# EAGLE board PCB (EAGLE 9.7.0)
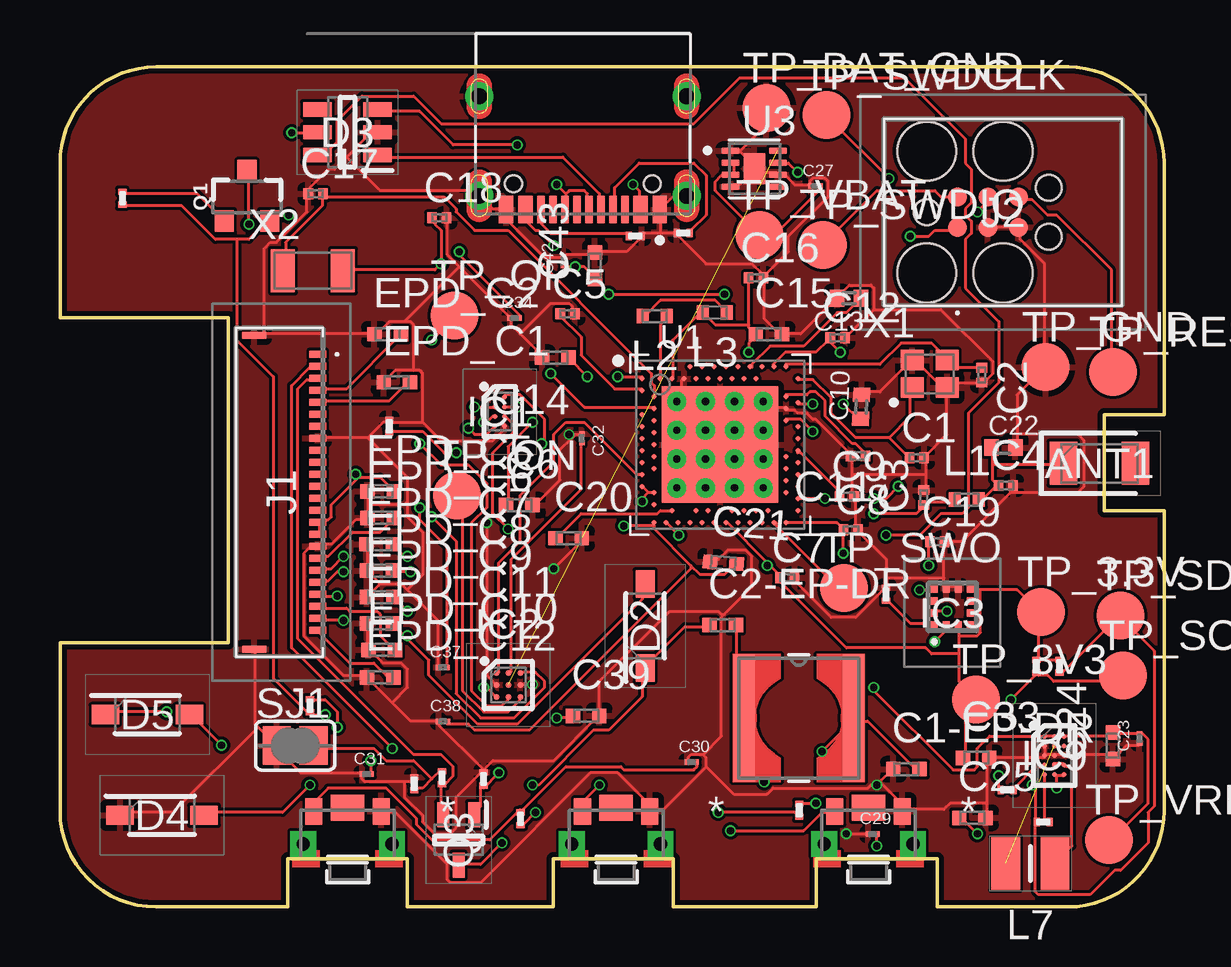
[diagram p0: board, top side]
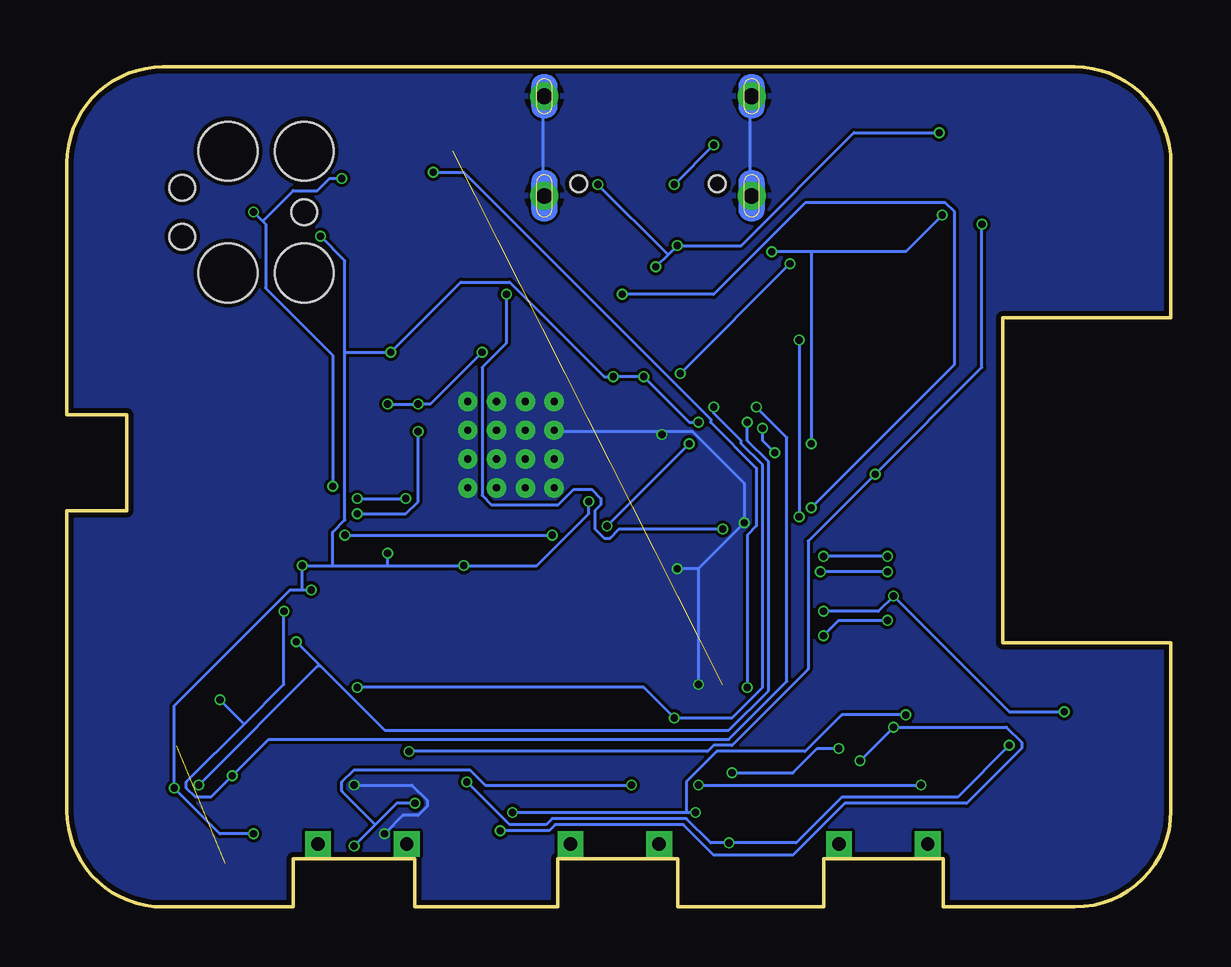
[diagram p1: board, bottom side, seen from below]

Size 46 x 35 mm. Coordinates in mm from the lower left corner, seen from the top.
Outline: 0.01,4 0,4.01 0,11 7,11 7,24.55 0,24.55 0,31 arc-90 4,35 42,35 arc-90 46,31 46,20.5 43.5,20.5 43.5,16.5 46,16.5 46,4 arc-90 42,0 36.56,0 36.56,2 31.5,2 31.5,0 25.56,0 25.56,2 20.54,2 20.54,0 14.47,0 14.47,2 9.5,2 9.5,0 4,0 arc-90 0,4
Copper layers (1*16): Top 0.035mm / dielectric 1.6mm / Bottom 0.035mm
Design rules "jlcpcb-2layers": minimum track width 5mil, minimum drill 0.3mm, track to track 5mil, track to pad 5mil, pad to pad 5mil, via to via 5mil, smd to smd 5mil, copper to edge 0.2mm, drill to drill 6mil, minimum pad ring 10mil, minimum via ring 3mil, stop-mask expansion 4mil, vias tented up to drill 0mil, thermal gap 10mil

## Footprints (pad centres in the part's own frame; a part is rotated, then mirrored left to right if it is on the bottom)
2450AT18B100E_ANTC3216X140N = smd 1.15 x 1.8: 1 -1.5,0; 2 1.5,0
NORDIC_NRF_3_RESC0201_N = smd 0.4 x 0.45: 1 -0.305,0; 2 0.305,0
NORDIC_NRF_3_RESC0402_N = smd 0.6 x 0.6: 1 -0.55,0; 2 0.55,0
PERFECT_0402_0402 = smd 0.6 x 0.7: 1 -0.5,0; 2 0.5,0
GRM011R60J152KE01L_2_CAPC0201X13N = smd 0.22 x 0.23: 1 -0.185,0; 2 0.185,0
ESP32_C6_LIBRARY_5_SOD3716X135N = smd 1.15 x 0.8: 1 -1.75,0; 2 1.75,0
ESP32_C6_LIBRARY_3_SOT95P280X145-6N = smd 1.2 x 0.6: 1 -1.25,0.95; 2 -1.25,0; 3 -1.25,-0.95; 4 1.25,-0.95; 5 1.25,0; 6 1.25,0.95
BQ25180YBGR_BGA8C40P2X4_100X155X50 = smd 0.2 x 0.2: A1 -0.2,0.6; A2 0.2,0.6; B1 -0.2,0.2; B2 0.2,0.2; C1 -0.2,-0.2; C2 0.2,-0.2; D1 -0.2,-0.6; D2 0.2,-0.6
DRV2605YZFR_BGA9C50P3X3_144X144X62 = smd 0.25 x 0.25: A1 -0.5,0.5; A2 0,0.5; A3 0.5,0.5; B1 -0.5,0; B2 0,0; B3 0.5,0; C1 -0.5,-0.5; C2 0,-0.5; C3 0.5,-0.5
BMA423_BMA423 = smd 0.3 x 0.35: 1 -0.75,-0.775; 2 -0.25,-0.775; 3 0.25,-0.775; 4 0.75,-0.775; 7 0.75,0.775; 8 0.25,0.775; 9 -0.25,0.775; 10 -0.75,0.775 | smd 0.35 x 0.3: 5 0.775,-0.25; 6 0.775,0.25; 11 -0.775,0.25; 12 -0.775,-0.25
RT6160AWSC_BGA15C40P3X5_140X230X60 = smd 0.216 x 0.216: A1 -0.4,0.8; A2 0,0.8; A3 0.4,0.8; B1 -0.4,0.4; B2 0,0.4; B3 0.4,0.4; C1 -0.4,0; C2 0,0; C3 0.4,0; D1 -0.4,-0.4; D2 0,-0.4; D3 0.4,-0.4; E1 -0.4,-0.8; E2 0,-0.8; E3 0.4,-0.8
503480-2400_5034802400 = smd 0.3 x 0.7: 1 -5.75,1.525; 2 -5.25,1.525; 3 -4.75,1.525; 4 -4.25,1.525; 5 -3.75,1.525; 6 -3.25,1.525; 7 -2.75,1.525; 8 -2.25,1.525; 9 -1.75,1.525; 10 -1.25,1.525; 11 -0.75,1.525; 12 -0.25,1.525; 13 0.25,1.525; 14 0.75,1.525; 15 1.25,1.525; 16 1.75,1.525; 17 2.25,1.525; 18 2.75,1.525; 19 3.25,1.525; 20 3.75,1.525; 21 4.25,1.525; 22 4.75,1.525; 23 5.25,1.525; 24 5.75,1.525 | smd 0.3 x 1: MP1 -6.54,-1.125; MP2 6.54,-1.125
TC2030-IDC_TC2030IDC = smd 0.783 x 0.783: 1 -0.953,-0.635; 2 -0.953,0.635; 3 0.317,-0.635; 4 0.317,0.635; 5 1.588,-0.635; 6 1.588,0.635 | hole 2.451: -2.223,-2.54; -2.223,2.54; 0.952,-2.54; 0.952,2.54 | hole 1.067: -2.223,0; 2.857,-1.016; 2.857,1.016
KH-TYPE-C-16P_KINGHELM_KH-TYPE-C-16P = smd 0.6 x 1.15: A1_B12 -3.2,4.725; A4_B9 -2.4,4.725; A9_B4 2.4,4.725; A12_B1 3.2,4.725 | smd 0.3 x 1.15: A5 -1.25,4.725; A6 -0.25,4.725; A7 0.25,4.725; A8 1.25,4.725; B5 1.75,4.725; B6 0.75,4.725; B7 -0.75,4.725; B8 -1.75,4.725 | drill 0.65 pad 1.05: SH1 -4.32,0; SH2 4.32,0; SH3 -4.32,4.15; SH4 4.32,4.15 | hole 0.7: -2.89,3.65; 2.89,3.65
NORDIC_NRF_2_RESC0402_L = smd 0.5 x 0.6: 1 -0.5,0; 2 0.5,0
ESP32_C6_LIBRARY_2_IND_4828-WE-TPC_WRE = smd 0.9 x 5.3: 1 -2.286,0; 2 2.286,0
MLP2016SR47MT0S1_INDC2016X100N = smd 1.2 x 2.2: 1 -1.028,0; 2 1.028,0
ESP32_C6_LIBRARY_4_ESP32_C6_LIBRARY_4_ESP32_C6_LIBRARY_4_ESP32_C6_LIBRARY_4_ESP32_WROVER_SPARKFUN-DISCRETESEMI_SOT23-3 = smd 0.8 x 0.9: 1 -0.95,-1; 2 0.95,-1; 3 0,1.1
ESP32_C6_LIBRARY_6_SOT65P210X110-3N = smd 1.05 x 0.5: 1 -1.05,0.65; 2 -1.05,-0.65; 3 1.05,0
CPF0201D7K68C1_0201 = smd 0.35 x 0.25: 1 0,0.275; 2 0,-0.275
ESP32_C6_LIBRARY_7_JUMPER_SJ = smd 1.168 x 1.6: 1 -0.762,0; 2 0.762,0
2025-10-22_07-23-44_LIBRARY_SW_EVP-AKE31A_PAN = smd 0.711 x 1.092: 1 -1.4,-0.972; 2 1.4,-0.972 | drill 0.559 pad 0.914 square: 3 -1.848,0.381; 4 1.848,0.381 | smd 1.397 x 1.092: 5 0,-1.124
HECTOR_WATCH_1_TP20R = smd 2 x 2: TP 0,0
NORDIC_NRF_4_AQFN50P700X700X85_HS-74N = smd 4.85 x 4.85: P$74 0,0 | drill 0.3 pad 0.6: P$75 -1.8,1.8; P$76 -0.6,1.8; P$77 0.6,1.8; P$78 1.8,1.8; P$79 -1.8,0.6; P$80 -0.6,0.6; P$81 0.6,0.6; P$82 1.8,0.6; P$83 -1.8,-0.6; P$84 -0.6,-0.6; P$85 0.6,-0.6; P$86 1.8,-0.6; P$87 -1.8,-1.8; P$88 -0.6,-1.8; P$89 0.6,-1.8; P$90 1.8,-1.8 | smd 0.2 x 0.2: P$A8 -1.25,3.25; P$A10 -0.75,3.25; P$A12 -0.25,3.25; P$A14 0.25,3.25; P$A16 0.75,3.25; P$A18 1.25,3.25; P$A20 1.75,3.25; P$A22 2.25,3.25; P$A23 2.75,3.25; P$AA24 3.25,-2.25; P$AB2 -2.75,-2.5; P$AC5 -2,-2.75; P$AC9 -1,-2.75; P$AC11 -0.5,-2.75; P$AC13 0,-2.75; P$AC15 0.5,-2.75; P$AC17 1,-2.75; P$AC19 1.5,-2.75; P$AC21 2,-2.75; P$AC24 3.25,-2.75; P$AD2 -2.75,-3.25; P$AD4 -2.25,-3.25; P$AD6 -1.75,-3.25; P$AD8 -1.25,-3.25; P$AD10 -0.75,-3.25; P$AD12 -0.25,-3.25; P$AD14 0.25,-3.25; P$AD16 0.75,-3.25; P$AD18 1.25,-3.25; P$AD20 1.75,-3.25; P$AD22 2.25,-3.25; P$AD23 2.75,-3.25; P$B1 -3.25,2.75; P$B3 -2.5,2.75; P$B5 -2,2.75; P$B7 -1.5,2.75; P$B9 -1,2.75; P$B11 -0.5,2.75; P$B13 0,2.75; P$B15 0.5,2.75; P$B17 1,2.75; P$B19 1.5,2.75; P$B24 3.25,2.75; P$C1 -3.25,2.25; P$D2 -2.75,2; P$D23 2.75,2; P$E24 3.25,1.75; P$F2 -2.75,1.5; P$F23 2.75,1.5; P$G1 -3.25,1.25; P$H2 -2.75,1; P$H23 2.75,1; P$J1 -3.25,0.75; P$J24 3.25,0.75; P$K2 -2.75,0.5; P$L1 -3.25,0.25; P$L24 3.25,0.25; P$M2 -2.75,0; P$N1 -3.25,-0.25; P$N24 3.25,-0.25; P$P2 -2.75,-0.5; P$P23 2.75,-0.5; P$R1 -3.25,-0.75; P$R24 3.25,-0.75; P$T2 -2.75,-1; P$T23 2.75,-1; P$U1 -3.25,-1.25; P$U24 3.25,-1.25; P$V23 2.75,-1.5; P$W1 -3.25,-1.75; P$W24 3.25,-1.75; P$Y2 -2.75,-2; P$Y23 2.75,-2
ESP32_C6_LIBRARY_SON50P200X200X80-9N = smd 0.76 x 0.27: 1 -0.985,0.75; 2 -0.985,0.25; 3 -0.985,-0.25; 4 -0.985,-0.75; 5 0.985,-0.75; 6 0.985,-0.25; 7 0.985,0.25; 8 0.985,0.75 | smd 0.9 x 1.3: 9 0,0
NORDIC_NRF_BT-XTAL_2016_N = smd 0.95 x 0.85: 1 -0.725,-0.575; 2 0.725,-0.575; 3 0.725,0.575; 4 -0.725,0.575
NORDIC_NRF_1_XTAL_3215_N = smd 1 x 1.8: 1 -1.25,0; 2 1.25,0

## Placement (x,y rotation side)
ANT1  2450AT18B100E_2450AT18B100E  [2450AT18B100E_ANTC3216X140N]  43.31,18.48 0 top
C1  12pF  [NORDIC_NRF_3_RESC0201_N]  35.7,18.71 0 top
C1-EP-DR  10uF  [NORDIC_NRF_3_RESC0402_N]  35.27,5.74 0 top
C2  12pF  [NORDIC_NRF_3_RESC0201_N]  38.4,22.16 270 top
C2-EP-DR  4.7uF/25V  [NORDIC_NRF_3_RESC0402_N]  27.61,11.74 0 top
C3  1pF  [NORDIC_NRF_3_RESC0201_N]  35.99,17.06 90 top
C4  1pF  [NORDIC_NRF_3_RESC0201_N]  39.41,17.56 0 top
C5  100nF  [NORDIC_NRF_3_RESC0201_N]  21.15,24.71 0 top
C6  4.7uF  [NORDIC_NRF_3_RESC0402_N]  19.14,16.74 0 top
C7  100nF  [NORDIC_NRF_3_RESC0201_N]  30.3,13.71 0 top
C8  100nF  [NORDIC_NRF_3_RESC0201_N]  32.95,15.71 0 top
C9  820pF  [NORDIC_NRF_3_RESC0201_N]  32.79,17.1 0 top
C10  N.C.  [PERFECT_0402_0402]  33.38,20.84 87.3 top
C11  100pF  [NORDIC_NRF_3_RESC0201_N]  33.25,18.79 180 top
C12  100nF  [NORDIC_NRF_3_RESC0201_N]  32.4,23.71 0 top
C13  N.C.  [PERFECT_0402_0402]  32.88,25.36 180 top
C14  4.7uF  [NORDIC_NRF_3_RESC0402_N]  20.64,22.89 180 top
C15  1.0uF  [NORDIC_NRF_3_RESC0402_N]  29.54,23.86 0 top
C16  47nF  [NORDIC_NRF_3_RESC0201_N]  29,26.21 0 top
C17  12pF  [NORDIC_NRF_3_RESC0201_N]  10.65,29.71 0 top
C18  12pF  [NORDIC_NRF_3_RESC0201_N]  15.8,28.71 0 top
C19  100nF  [NORDIC_NRF_3_RESC0201_N]  36.55,15.21 0 top
C20  4.7uF  [NORDIC_NRF_3_RESC0402_N]  21.19,15.36 0 top
C21  4.7uF  [NORDIC_NRF_3_RESC0402_N]  27.64,14.34 355.9 top
C22  N.C.  [PERFECT_0402_0402]  39.31,19.14 0 top
C23  GRM011R60J152KE01L_2_GRM011R60J152KE01L  [GRM011R60J152KE01L_2_CAPC0201X13N]  44.97,7.02 90 top
C24  10uF  [NORDIC_NRF_3_RESC0402_N]  43.87,6.71 90 top
C25  22uF  [NORDIC_NRF_3_RESC0402_N]  38.02,3.71 0 top
C27  0.1uF  [GRM011R60J152KE01L_2_CAPC0201X13N]  31.48,30.03 0 top
C29  1uF  [GRM011R60J152KE01L_2_CAPC0201X13N]  33.86,3.03 0 top
C30  1uF  [GRM011R60J152KE01L_2_CAPC0201X13N]  26.32,6.03 0 top
C31  1uF  [GRM011R60J152KE01L_2_CAPC0201X13N]  12.78,5.53 0 top
C32  1uF  [GRM011R60J152KE01L_2_CAPC0201X13N]  21.74,19.53 270 top
C33  22uF  [NORDIC_NRF_3_RESC0402_N]  38.17,6.21 0 top
C34  0.1uF  [GRM011R60J152KE01L_2_CAPC0201X13N]  18.94,24.53 0 top
C37  1uF  [GRM011R60J152KE01L_2_CAPC0201X13N]  15.95,9.98 0 top
C38  1uF  [GRM011R60J152KE01L_2_CAPC0201X13N]  15.96,7.73 0 top
C39  10uF  [NORDIC_NRF_3_RESC0402_N]  21.92,7.96 0 top
C42  0.1uF  [GRM011R60J152KE01L_2_CAPC0201X13N]  20.97,26.9 90 top
C43  4.7uF  [NORDIC_NRF_3_RESC0402_N]  22.29,26.72 90 top
D2  MBR0530  [ESP32_C6_LIBRARY_5_SOD3716X135N]  24.38,11.71 90 top
D3  ESP32_C6_LIBRARY_3_USBLC6-2SC6Y  [ESP32_C6_LIBRARY_3_SOT95P280X145-6N]  11.98,32.28 180 top
D4  MBR0530  [ESP32_C6_LIBRARY_5_SOD3716X135N]  4.25,3.82 0 top
D5  MBR0530  [ESP32_C6_LIBRARY_5_SOD3716X135N]  3.64,8.02 0 top
EPD_C1  1uF/50V  [NORDIC_NRF_3_RESC0402_N]  14.04,21.86 0 top
EPD_C2  1uF/50V  [NORDIC_NRF_3_RESC0402_N]  13.65,23.86 0 top
EPD_C5  0.1uF/50V  [NORDIC_NRF_3_RESC0402_N]  13.36,17.31 0 top
EPD_C6  1uF/50V  [NORDIC_NRF_3_RESC0402_N]  13.36,16.21 0 top
EPD_C7  1uF/50V  [NORDIC_NRF_3_RESC0402_N]  13.32,15.11 0 top
EPD_C8  1uF/50V  [NORDIC_NRF_3_RESC0402_N]  13.33,14.01 0 top
EPD_C9  1uF/50V  [NORDIC_NRF_3_RESC0402_N]  13.34,12.91 0 top
EPD_C10  1uF/50V  [NORDIC_NRF_3_RESC0402_N]  13.4,10.71 0 top
EPD_C11  1uF/50V  [NORDIC_NRF_3_RESC0402_N]  13.33,11.81 0 top
EPD_C12  1uF/50V  [NORDIC_NRF_3_RESC0402_N]  13.34,9.56 0 top
IC1  BQ25180YBGR_BQ25180YBGR  [BQ25180YBGR_BGA8C40P2X4_100X155X50]  18.32,20.64 0 top
IC2  DRV2605YZFR_DRV2605YZFR  [DRV2605YZFR_BGA9C50P3X3_144X144X62]  18.68,9.25 0 top
IC3  BMA423_BMA423  [BMA423_BMA423]  37.18,12.5 0 top
IC9  RT6160AWSC_RT6160AWSC  [RT6160AWSC_BGA15C40P3X5_140X230X60]  41.43,6.31 0 top
J1  503480-2400_503480-2400  [503480-2400_5034802400]  9.22,17.28 270 top
J2  TC2030-IDC_TC2030-IDC  [TC2030-IDC_TC2030IDC]  38.34,28.95 0 top
J4  KH-TYPE-C-16P_KH-TYPE-C-16P  [KH-TYPE-C-16P_KINGHELM_KH-TYPE-C-16P]  21.79,33.78 180 top
L1  3.9nH  [NORDIC_NRF_2_RESC0402_L]  37.79,16.97 0 top
L2  10uH  [NORDIC_NRF_2_RESC0402_L]  24.79,24.62 180 top
L3  15nH  [NORDIC_NRF_2_RESC0402_L]  27.29,24.77 179.7 top
L5  68uH  [ESP32_C6_LIBRARY_2_IND_4828-WE-TPC_WRE]  30.78,7.87 0 top
L7  MLP2016SR47MT0S1_FTC252012SR47MBCA  [MLP2016SR47MT0S1_INDC2016X100N]  40.43,1.81 0 top
Q1  20V/4.2A/52mΩ/1.4W  [ESP32_C6_LIBRARY_4_ESP32_C6_LIBRARY_4_ESP32_C6_LIBRARY_4_ESP32_C6_LIBRARY_4_ESP32_WROVER_SPARKFUN-DISCRETESEMI_SOT23-3]  7.79,29.58 0 top
Q3  SI1308EDL-T1-GE3  [ESP32_C6_LIBRARY_6_SOT65P210X110-3N]  16.61,2.79 270 top
R1_EP_DR  0.47  [CPF0201D7K68C1_0201]  15.92,5.38 0 top
R1_USB  5K1  [CPF0201D7K68C1_0201]  25.97,28.08 90 top
R2  CPF0201D7K68C1_CPF0201D7K68C1  [CPF0201D7K68C1_0201]  40.97,3.54 90 top
R2_EP_DR  10K  [CPF0201D7K68C1_0201]  17.65,5.33 0 top
R2_USB  5K1  [CPF0201D7K68C1_0201]  23.97,27.96 90 top
R3  CPF0201D7K68C1_CPF0201D7K68C1  [CPF0201D7K68C1_0201]  34.42,13.03 0 top
R4  0  [CPF0201D7K68C1_0201]  39.47,4.88 90 top
R5  10K  [CPF0201D7K68C1_0201]  19.19,3.68 0 top
R7  10K  [CPF0201D7K68C1_0201]  30.8,4.03 0 top
R8  10K  [CPF0201D7K68C1_0201]  10.41,8.38 0 top
R9  10K  [CPF0201D7K68C1_0201]  13.72,20.03 0 top
R17  3K3  [CPF0201D7K68C1_0201]  40.68,10.03 0 top
R18  3K3  [CPF0201D7K68C1_0201]  41.64,10.03 0 top
R_PWR_EPD  10K  [CPF0201D7K68C1_0201]  2.6,29.53 0 top
R_TYPE_SEL  2.2  [CPF0201D7K68C1_0201]  14.76,5.13 0 top
SJ1  [ESP32_C6_LIBRARY_7_JUMPER_SJ]  9.8,6.72 0 top
SW_DN  2025-10-22_07-23-44_LIBRARY_EVP-AKE31ASW_EVP-AKE31A_PAN  [2025-10-22_07-23-44_LIBRARY_SW_EVP-AKE31A_PAN]  23.17,3.01 180 top
SW_ENT  2025-10-22_07-23-44_LIBRARY_EVP-AKE31ASW_EVP-AKE31A_PAN  [2025-10-22_07-23-44_LIBRARY_SW_EVP-AKE31A_PAN]  33.69,3.01 180 top
SW_UP  2025-10-22_07-23-44_LIBRARY_EVP-AKE31ASW_EVP-AKE31A_PAN  [2025-10-22_07-23-44_LIBRARY_SW_EVP-AKE31A_PAN]  11.98,3.01 180 top
TP_3.3V  HECTOR_WATCH_1_TPTP20R  [HECTOR_WATCH_1_TP20R]  40.88,12.29 0 top
TP_3V3  HECTOR_WATCH_1_TPTP20R  [HECTOR_WATCH_1_TP20R]  38.17,8.64 0 top
TP_BAT_GND  HECTOR_WATCH_1_TPTP20R  [HECTOR_WATCH_1_TP20R]  29.43,33.29 0 top
TP_GND  HECTOR_WATCH_1_TPTP20R  [HECTOR_WATCH_1_TP20R]  41.07,22.49 0 top
TP_ON  HECTOR_WATCH_1_TPTP20R  [HECTOR_WATCH_1_TP20R]  16.55,17.14 0 top
TP_OP  HECTOR_WATCH_1_TPTP20R  [HECTOR_WATCH_1_TP20R]  16.43,24.64 0 top
TP_RESET  HECTOR_WATCH_1_TPTP20R  [HECTOR_WATCH_1_TP20R]  43.87,22.29 0 top
TP_SCL  HECTOR_WATCH_1_TPTP20R  [HECTOR_WATCH_1_TP20R]  44.29,9.64 0 top
TP_SDA  HECTOR_WATCH_1_TPTP20R  [HECTOR_WATCH_1_TP20R]  44.18,12.14 0 top
TP_SWDCLK  HECTOR_WATCH_1_TPTP20R  [HECTOR_WATCH_1_TP20R]  31.93,32.99 0 top
TP_SWDIO  HECTOR_WATCH_1_TPTP20R  [HECTOR_WATCH_1_TP20R]  31.8,27.59 0 top
TP_SWO  HECTOR_WATCH_1_TPTP20R  [HECTOR_WATCH_1_TP20R]  32.66,13.29 0 top
TP_VBAT  HECTOR_WATCH_1_TPTP20R  [HECTOR_WATCH_1_TP20R]  29.15,27.99 0 top
TP_VREG  HECTOR_WATCH_1_TPTP20R  [HECTOR_WATCH_1_TP20R]  43.71,2.79 0 top
U1  NORDIC_NRF_4_NRF52840_QF  [NORDIC_NRF_4_AQFN50P700X700X85_HS-74N]  27.5,19.26 0 top
U3  ESP32_C6_LIBRARY_MAX17048G+T10  [ESP32_C6_LIBRARY_SON50P200X200X80-9N]  28.93,30.76 0 top
X1  32MHz  [NORDIC_NRF_BT-XTAL_2016_N]  36.24,22.21 0 top
X2  32.768kHz  [NORDIC_NRF_1_XTAL_3215_N]  10.54,26.51 0 top

## Library data of the parts
ANT1 = InkTime_v5; ARROW_PART_NUMBER: 2450AT18B100E; ARROW_PRICE-STOCK: https://www.arrow.com/en/products/2450at18b100e/johanson-dielectrics?utm_currency=USD&region=nac; DESCRIPTION: Antennas 2.45GHz ANTENNA; HEIGHT: 1.4mm; MANUFACTURER_NAME: JOHANSON TECHNOLOGY; MANUFACTURER_PART_NUMBER: 2450AT18B100E; MOUSER_PART_NUMBER: 609-2450AT18B100E; MOUSER_PRICE-STOCK: https://www.mouser.co.uk/ProductDetail/Johanson-Technology/2450AT18B100E?qs=yCnrNFeXz%252Bh5MFsFIXGZGA%3D%3D
C1 C1-EP-DR C2 C2-EP-DR C3-C22 C24 C25 C33 C39 C43 EPD_C1 EPD_C2 EPD_C5-EPD_C12 L1-L3 R1_EP_DR R1_USB R2 R2_EP_DR R2_USB R3-R5 R7-R9 R17 R18 R_PWR_EPD R_TYPE_SEL SJ1 TP_3.3V TP_3V3 TP_BAT_GND TP_GND TP_ON TP_OP TP_RESET TP_SCL TP_SDA TP_SWDCLK TP_SWDIO TP_SWO TP_VBAT TP_VREG U1 X1 X2 = InkTime_v5
C23 C27 C29-C32 C34 C37 C38 C42 = InkTime_v5; AVAILABILITY: In Stock; CHECK_PRICES: https://www.snapeda.com/parts/GRM011R60J152KE01L/Murata/view-part/?ref=eda; DESCRIPTION: SMD Capacitor X5R(EIA) with Capacitance: 1500pF Tol. 10%. Rated Voltage: 6.3Vdc; MF: Murata; MP: GRM011R60J152KE01L; PACKAGE: 0201 Murata; PRICE: None; SNAPEDA_LINK: https://www.snapeda.com/parts/GRM011R60J152KE01L/Murata/view-part/?ref=snap
D2 D4 D5 = InkTime_v5; AVAILABILITY: In Stock; CHECK_PRICES: https://www.snapeda.com/parts/MBR0530/Onsemi/view-part/?ref=eda; DESCRIPTION: Diode Schottky 30 V 500mA Surface Mount SOD-123; MF: ON Semiconductor; MP: MBR0530; PACKAGE: SOD-123-2 ON Semiconductor; PRICE: None; PURCHASE-URL: https://www.snapeda.com/api/url_track_click_mouser/?unipart_id=179458&manufacturer=ON Semiconductor&part_name=MBR0530&search_term=None; SNAPEDA_LINK: https://www.snapeda.com/parts/MBR0530/Onsemi/view-part/?ref=snap
D3 = InkTime_v5; AVAILABILITY: In Stock; CHECK_PRICES: https://www.snapeda.com/parts/USBLC6-2SC6Y/STMicroelectronics/view-part/?ref=eda; DESCRIPTION: 17V Clamp 5A (8/20µs) Ipp Tvs Diode Surface Mount SOT-23-6; MF: STMicroelectronics; MP: USBLC6-2SC6Y; PACKAGE: SOT-23-6 STMicroelectronics; PRICE: None; SNAPEDA_LINK: https://www.snapeda.com/parts/USBLC6-2SC6Y/STMicroelectronics/view-part/?ref=snap
IC1 = InkTime_v5; ARROW_PART_NUMBER: BQ25180YBGR; ARROW_PRICE-STOCK: https://www.arrow.com/en/products/bq25180ybgr/texas-instruments?utm_currency=USD&region=nac; DESCRIPTION: Charger IC Lithium Ion/Polymer, Lithium Iron Phosphate 8-DSBGA (1.6x1.1); HEIGHT: 0.5mm; MANUFACTURER_NAME: Texas Instruments; MANUFACTURER_PART_NUMBER: BQ25180YBGR; MOUSER_PART_NUMBER: 595-BQ25180YBGR; MOUSER_PRICE-STOCK: https://www.mouser.co.uk/ProductDetail/Texas-Instruments/BQ25180YBGR?qs=doiCPypUmgEWjAK%252BJAX6Tw%3D%3D
IC2 = InkTime_v5; ARROW_PART_NUMBER: DRV2605YZFR; ARROW_PRICE-STOCK: https://www.arrow.com/en/products/drv2605yzfr/texas-instruments?region=nac; DESCRIPTION: Haptic Driver for ERM/LRA with Built-In Library and Smart Loop Architecture; HEIGHT: 0.625mm; MANUFACTURER_NAME: Texas Instruments; MANUFACTURER_PART_NUMBER: DRV2605YZFR
IC3 = InkTime_v5; ARROW_PART_NUMBER: BMA423; ARROW_PRICE-STOCK: https://www.arrow.com/en/products/bma423/bosch; DESCRIPTION: Accelerometers Triaxial low-g 12bit Acceleration Sensor; HEIGHT: 1mm; MANUFACTURER_NAME: BOSCH; MANUFACTURER_PART_NUMBER: BMA423; MOUSER_PART_NUMBER: 262-BMA423; MOUSER_PRICE-STOCK: https://www.mouser.co.uk/ProductDetail/Bosch-Sensortec/BMA423?qs=HXFqYaX1Q2xC%252BSgeGoX3mg%3D%3D
IC9 = InkTime_v5; DESCRIPTION: Buck-Boost Regulator Positive Output Step-Up/Step-Down I2C DC-DC Controller IC 15-WL-CSP (BSC) (1.4x2.3); HEIGHT: 0.6mm; MANUFACTURER_NAME: RICHTEK; MANUFACTURER_PART_NUMBER: RT6160AWSC; MOUSER_PART_NUMBER: 835-RT6160AWSC; MOUSER_PRICE-STOCK: https://www.mouser.co.uk/ProductDetail/Richtek/RT6160AWSC?qs=amGC7iS6iy%2FLd9PSoixZXQ%3D%3D
J1 = InkTime_v5; DESCRIPTION: FFC & FPC Connectors 0.5mm FPC RA SMT Dual Contact 24Ckt; HEIGHT: 1.87mm; MANUFACTURER_NAME: Molex; MANUFACTURER_PART_NUMBER: 503480-2400; MOUSER_PART_NUMBER: 538-503480-2400; MOUSER_PRICE-STOCK: https://www.mouser.co.uk/ProductDetail/Molex/503480-2400?qs=OAhjpuo3Vu7efIoxFh9AOw%3D%3D
J2 = InkTime_v5; DESCRIPTION: CABLE ADAPTER 6 POS; HEIGHT: 19mm; MANUFACTURER_NAME: Tag Connect; MANUFACTURER_PART_NUMBER: TC2030-IDC
J4 = InkTime_v5; AVAILABILITY: Not in stock; CHECK_PRICES: https://www.snapeda.com/parts/KH-TYPE-C-16P/Kinghelm/view-part/?ref=eda; MF: kinghelm; MP: KH-TYPE-C-16P; PACKAGE: None; PRICE: None; SNAPEDA_LINK: https://www.snapeda.com/parts/KH-TYPE-C-16P/Kinghelm/view-part/?ref=snap
L5 = InkTime_v5; COPYRIGHT: Copyright (C) 2024 Ultra Librarian. All rights reserved.; MANUFACTURER_PART_NUMBER: 744043680; MFR_NAME: Wurth Electronics
L7 = InkTime_v5; DESCRIPTION: SMD / SMT Inductors (Coils), L=0.47?H, L x W x T :; HEIGHT: 1mm; JLCPCB: https://jlcpcb.com/partdetail/6763488-FTC252012SR47MBCA/C5832368; MANUFACTURER_NAME: TDK; MANUFACTURER_PART_NUMBER: FTC252012SR47MBCA
Q1 = InkTime_v5; PROD_ID: TRAN-14388
Q3 = InkTime_v5; AVAILABILITY: In Stock; CHECK_PRICES: https://www.snapeda.com/parts/SI1308EDL-T1-GE3/Vishay+Siliconix/view-part/?ref=eda; DESCRIPTION: Si1308EDL-T1-GE3 N-channel MOSFET Transistor, 1.5 A, 30 V, 3-Pin SC-70 | Siliconix / Vishay SI1308EDL-T1-GE3; MF: Vishay Siliconix; MP: SI1308EDL-T1-GE3; PACKAGE: SOT-323 Vishay Semiconductor; PRICE: None; PURCHASE-URL: https://www.snapeda.com/api/url_track_click_mouser/?unipart_id=274603&manufacturer=Vishay Siliconix&part_name=SI1308EDL-T1-GE3&search_term=None; SNAPEDA_LINK: https://www.snapeda.com/parts/SI1308EDL-T1-GE3/Vishay+Siliconix/view-part/?ref=snap
SW_DN SW_ENT SW_UP = InkTime_v5; COPYRIGHT: Copyright (C) 2025 Ultra Librarian. All rights reserved.; DIGI-KEY_PART_NUMBER_1: P123437TR-ND; DIGI-KEY_PART_NUMBER_2: P123437CT-ND; DIGI-KEY_PART_NUMBER_3: P123437DKR-ND; MANUFACTURER_NAME: Panasonic; MANUFACTURER_PART_NUMBER: EVP-AKE31A
U3 = InkTime_v5; AVAILABILITY: In Stock; CHECK_PRICES: https://www.snapeda.com/parts/MAX17048G+T10/Analog+Devices/view-part/?ref=eda; DESCRIPTION: 3µA 1-Cell/2-Cell Fuel Gauge with ModelGauge; MF: Analog Devices; MP: MAX17048G+T10; PACKAGE: TDFN-8 Maxim; PRICE: None; PURCHASE-URL: https://www.snapeda.com/api/url_track_click_mouser/?unipart_id=329239&manufacturer=Analog Devices&part_name=MAX17048G+T10&search_term=None; SNAPEDA_LINK: https://www.snapeda.com/parts/MAX17048G+T10/Analog+Devices/view-part/?ref=snap

## Nets
3V3/1.7D: C34.2 IC2.C2 Q1.2 R5.2 R7.2 R8.2 R_PWR_EPD.2
3V3/2.4A: C6.1 C7.1 C8.1 C12.1 C14.1 C19.1 C25.1 C33.1 IC3.3 IC3.7 IC3.10 IC9.E2 IC9.E3 J2.1 R17.1 R18.1 TP_3.3V.TP TP_3V3.TP U1.P$A22 U1.P$AD14 U1.P$AD23 U1.P$B1 U1.P$W1 U1.P$Y2
ALERT: U3.5
D+: D3.4
D-: D3.6 U1.P$AD4
DN: D3.1 J4.B7
DP: D3.3 J4.A6 J4.B6
EPD_3V3: C1-EP-DR.2 EPD_C5.2 J1.15 J1.16 L5.2 Q1.3
EPD_BUSY: J1.9
EPD_CS: J1.12
EPD_DC: J1.11
EPD_RST: J1.10
GDR: J1.2 Q3.1 R2_EP_DR.2
GND: C1-EP-DR.1 C1.2 C2.2 C3.2 C4.2 C5.2 C6.2 C7.2 C8.2 C9.2 C10.2 C11.2 C12.2 C13.2 C14.2 C15.2 C16.2 C17.1 C18.2 C19.2 C20.2 C21.1 C22.2 C23.1 C24.1 C25.2 C27.1 C29.1 C30.1 C31.1 C32.1 C33.2 C34.1 C37.1 C38.1 C39.2 C42.2 C43.2 D3.2 D4.1 EPD_C1.1 EPD_C2.1 EPD_C5.1 EPD_C6.1 EPD_C7.1 EPD_C8.1 EPD_C9.1 EPD_C10.1 EPD_C11.1 EPD_C12.1 IC1.D2 IC2.B1 IC2.B3 IC3.8 IC3.9 IC9.B1 IC9.C1 IC9.C2 IC9.C3 J1.8 J1.17 J1.MP1 J1.MP2 J2.3 J2.5 J4.A1_B12 J4.A12_B1 J4.SH1 J4.SH2 J4.SH3 J4.SH4 R1_USB.1 R2_EP_DR.1 R2_USB.2 R3.1 R9.1 R_TYPE_SEL.1 SJ1.1 SW_DN.1 SW_ENT.1 SW_UP.1 TP_BAT_GND.TP TP_GND.TP U1.P$74 U1.P$75 U1.P$76 U1.P$77 U1.P$78 U1.P$79 U1.P$80 U1.P$81 U1.P$82 U1.P$83 U1.P$84 U1.P$85 U1.P$86 U1.P$87 U1.P$88 U1.P$89 U1.P$90 U1.P$B7 U1.P$F23 U3.1 U3.4 U3.6 U3.9 X1.2 X1.4
HAPTIC_EN: IC2.A1 U1.P$U1
IMU_INT1: IC3.5
IMU_INT2: IC3.6
LX1: IC9.B2 L7.1
LX2: IC9.D2 IC9.D3 L7.2
MOSI: J1.14
N$1: C5.1 U1.P$C1
N$2: IC9.D1 R4.2
N$3: U1.P$T2
N$4: IC3.1 R3.2
N$5: IC9.E1 R2.2
N$6: U1.P$AD6
N$7: IC1.D1 R9.2
N$8: U1.P$AD8
N$9: U1.P$AD10
N$10: U1.P$AC9
N$11: U1.P$AC11
N$12: U1.P$AD12
N$13: U1.P$AC13
N$14: U1.P$AC15
N$15: U1.P$AD16
N$16: U1.P$AC17
N$17: U1.P$AD18
N$18: U1.P$AC19
N$19: U1.P$AD20
N$20: U1.P$AC21
N$22: U1.P$R1
N$23: U1.P$P2
N$24: U1.P$N1
N$25: U1.P$M2
N$26: U1.P$L1
N$27: U1.P$K2
N$28: U1.P$J1
N$29: U1.P$H2
N$30: U1.P$G1
N$31: C20.1 U1.P$AC5
N$32: L2.1 U1.P$B3
N$33: L2.2 L3.1
N$34: U1.P$B9
N$35: U1.P$A10
N$36: U1.P$B11
N$37: U1.P$A12
N$38: U1.P$B13
N$39: U1.P$A14
N$40: U1.P$B15
N$41: U1.P$A16
N$42: U1.P$B17
N$43: U1.P$B19
N$44: U1.P$A20
N$45: C10.1 C15.1 C16.1 L3.2 U1.P$B5 U1.P$E24
N$46: C13.1 U1.P$A18
N$47: C17.2 U1.P$D2 X2.1
N$48: C18.1 U1.P$F2 X2.2
N$49: U1.P$R24
N$50: U1.P$AC24
N$51: U1.P$Y23
N$52: U1.P$W24
N$53: U1.P$V23
N$54: U1.P$U24
N$55: U1.P$T23
N$56: U1.P$P23
N$57: U1.P$L24
N$58: U1.P$J24
N$59: C9.1 U1.P$N24
N$60: C11.1 U1.P$D23
N$61: C2.1 U1.P$A23 X1.3
N$62: C1.1 U1.P$B24 X1.1
N$63: C31.2 R8.1 SW_ENT.2
N$64: ANT1.1 C4.1 C22.1 L1.2
N$65: C3.1 L1.1 U1.P$H23
N$66: J4.A7
N$67: C30.2 R5.1 SW_UP.2
N$68: J4.B5 R2_USB.1
N$69: J4.A5 R1_USB.2
N$70: EPD_C2.2 J1.4
N$71: C32.2 IC2.A2
N$72: C2-EP-DR.2 D5.2 L5.1 Q3.3
N$73: EPD_C1.2 J1.5
N$74: EPD_C7.2 J1.19
N$75: R1_EP_DR.1 R_TYPE_SEL.2 SJ1.2
N$76: EPD_C12.2 J1.24
N$77: EPD_C8.2 J1.20
N$79: EPD_C6.2 J1.18
N$80: EPD_C10.2 J1.22
N$81: C2-EP-DR.1 D2.1 D4.2
OUT+: IC2.A3 TP_OP.TP
OUT-: IC2.C3 TP_ON.TP
P0: U1.P$A8
P1.01/1.6C: Q1.1 R_PWR_EPD.1
P1.02/1.6C: C29.2 R7.1 SW_DN.2
PMIC_INT: IC1.A1
PREVGH: D5.1 EPD_C9.2 J1.21
PREVGL: D2.2 EPD_C11.2 J1.23
RESE: J1.3 Q3.2 R1_EP_DR.2
RESET: J2.6 TP_RESET.TP
SCK: J1.13
SCL/1.4C: IC2.C1 U3.7
SCL/2.4C: IC1.B1 IC3.12 R4.1 R17.2 TP_SCL.TP
SDA/1.4C: IC2.B2 U3.8
SDA/2.4C: IC1.C1 IC3.2 R2.1 R18.2 TP_SDA.TP
SWDCLK: J2.4 TP_SWDCLK.TP U1.P$AA24
SWDIO: J2.2 TP_SWDIO.TP
SWO: TP_SWO.TP U1.P$AD22
VBAT/1.2A: C27.2 TP_VBAT.TP U3.2 U3.3
VBAT/2.5C: C37.2 IC1.C2
VBUS/1.5D: C42.1 C43.1 D3.5 J4.A4_B9 J4.A9_B4
VBUS/2.6D: C21.2 C38.2 IC1.A2 U1.P$AD2
VREG: C23.2 C24.2 C39.1 IC1.B2 IC9.A1 IC9.A2 IC9.A3 TP_VREG.TP

## Tracks (layer width: path | path; a pad name or v marks a point on that pad's centre or on a via)
3V3/1.7D  (via drill 0.3)
  Top 0.127: v19.81,3.94 19.3,3.43 R5.2 | v27.43,3.94 30.61,3.94 30.73,3.81 R7.2 | v16.64,27.3 16.64,27.18 19.18,24.64 C34.2 | v9.53,28.83 8.89,28.83 8.76,28.7 Q1.2 8.64,28.57 7.87,27.81 7.37,27.81 | v14.99,19.3 15.88,18.41 17.02,18.41 17.78,17.65 17.78,16.64 17.14,16 17.14,9.02 17.78,8.38 18.41,8.38 18.67,8.64 IC2.C2 | 7.37,27.81 6.48,27.81 5.08,29.21 2.67,29.21 R_PWR_EPD.2 | 7.37,27.81 7.37,23.62 8.89,22.1 8.89,9.53 10.29,8.13 R8.2 10.41,8 v11.05,8
  Bottom 0.127: v27.43,3.94 20.19,3.94 | 20.19,3.94 v19.81,3.94 | 14.99,27.3 11.05,27.3 v9.53,28.83 | 14.99,27.3 v16.64,27.3 | 14.99,27.3 v14.99,19.3 | 20.19,3.94 20.19,5.21 18.92,6.48 15.24,6.48 13.72,8 v11.05,8
3V3/2.4A  (via drill 0.3)
  Top 0.127: R18.1 41.53,10.29 40.77,10.29 R17.1 40.77,10.41 40.77,12.19 TP_3.3V.TP 40.77,12.32 39.88,13.21 38.35,13.21 | 38.35,13.21 37.97,13.21 IC3.7 | 29.46,14.35 30.1,13.72 C7.1 30.1,13.59 30.1,13.46 32.77,10.79 36.07,10.79 36.32,10.54 37.47,10.54 | 29.46,14.35 27.81,16 U1.P$AD14 | 37.47,10.54 37.47,9.4 38.1,8.76 TP_3V3.TP 38.1,8.64 37.72,8.26 37.72,6.22 C33.1 | 37.47,10.54 37.47,11.3 | 37.47,11.3 37.47,11.68 IC3.3 | 38.35,13.21 38.35,11.43 38.23,11.3 37.47,11.3 | v23.24,22.1 24.26,22.1 U1.P$B1 | v21.97,22.1 21.21,22.86 C14.1 | v19.68,20.19 18.67,19.18 18.67,16.76 C6.1 | U1.P$A22 29.72,22.61 30.23,23.11 31.5,23.11 32,23.62 C12.1 32.13,23.62 32.13,23.5 v32.51,23.11 | U1.P$AD23 30.23,16 32.38,16 32.64,15.75 C8.1 32.64,15.62 v32.64,14.73 | 24.51,17.27 24.77,17.27 U1.P$Y2 | 24.51,17.27 24.26,17.53 U1.P$W1 | 41.53,5.46 41.78,5.46 IC9.E3 | v41.53,4.95 41.53,5.46 | v38.23,3.05 37.59,3.68 C25.1 | 41.53,5.46 IC9.E2 | v35.81,13.21 36.32,13.21 IC3.10 | v36.2,14.22 36.2,15.11 C19.1 | 24.51,17.27 24.26,17.02 v24.26,16.89 | v35.43,27.94 36.2,27.94 36.45,28.19 37.34,28.19 J2.1 | v29.46,14.22 29.46,14.35
  Bottom 0.127: v19.68,20.19 20.07,20.19 v21.97,22.1 v23.24,22.1 23.62,22.1 27.56,26.04 29.59,26.04 v32.51,23.11 34.42,23.11 | v38.23,3.05 39.62,3.05 v41.53,4.95 41.53,8.38 36.7,13.21 36.2,13.21 | 36.2,13.21 v35.81,13.21 | 36.2,13.21 v36.2,14.22 34.92,14.22 | v24.26,16.89 24.26,16.38 26.42,14.22 v29.46,14.22 32.64,14.22 | 34.92,14.22 32.64,14.22 | v35.43,27.94 34.42,26.92 34.42,23.11 | 34.42,23.11 34.42,16.13 34.92,15.62 34.92,14.22 | 32.64,14.22 v32.64,14.73
D-  (via drill 0.3)
  Top 0.127: v25.78,15.49 25.27,16 U1.P$AD4 | v34.42,15.49 35.81,15.49 36.7,16.38 37.59,16.38 37.85,16.64 37.85,20.57 39.12,21.84 39.12,24.38 37.72,25.78 37.72,27.81 37.97,28.07 37.97,28.57 37.72,28.83 37.72,29.08 37.97,29.34 37.97,30.73 37.72,30.99 37.72,32 35.18,34.54 28.32,34.54 26.42,32.64 15.88,32.64 14.73,33.78 12.57,33.78 11.56,32.77 11.56,31.88 11.05,31.37 10.79,31.37 D3.6
  Bottom 0.127: v34.42,15.49 v25.78,15.49
DN
  Top 0.127: J4.B7 22.48,29.08 22.48,29.72 20.95,31.24 13.34,31.24 D3.1
DP  (via drill 0.3)
  Top 0.127: 21.08,29.72 21.08,29.08 J4.B6 | 21.08,29.72 21.21,29.84 21.84,29.84 21.97,29.72 21.97,29.08 J4.A6 | v19.05,31.75 16.38,31.75 14.99,33.15 13.34,33.15 D3.3 | 21.08,29.72 v20.7,30.1
  Bottom 0.127: v20.7,30.1 v19.05,31.75
EPD_3V3  (via drill 0.3)
  Top 0.127: C1-EP-DR.2 35.81,5.84 35.56,5.84 33.66,7.75 33.15,7.75 L5.2 33.02,7.75 v31.75,6.48 | 12.45,17.91 13.34,17.91 13.84,17.4 EPD_C5.2 | 12.45,17.91 11.3,16.76 11.3,16.26 11.18,16.13 10.79,16.13 J1.15 10.79,16 10.79,15.62 J1.16 | v7.87,28.45 7.87,30.61 Q1.3 | 12.45,17.91 v12.32,18.03
  Bottom 0.127: v7.87,28.45 7.87,22.48 v12.32,18.03 15.11,15.24 15.11,9.91 18.29,6.73 19.05,6.73 19.3,6.48 v31.75,6.48
GDR  (via drill 0.3)
  Top 0.127: Q3.1 17.27,3.94 17.53,4.19 17.53,4.95 R2_EP_DR.2 17.65,4.95 v18.29,5.59 | v13.84,6.6 9.65,10.79 9.65,21.72 10.41,22.48 10.67,22.48 J1.2
  Bottom 0.127: v13.84,6.6 14.73,6.6 15.75,5.59 v18.29,5.59
GND  (via drill 0.3)
  Top 0.127: v32.77,3.05 33.66,3.05 C29.1 | 34.16,5.21 34.67,5.71 C1-EP-DR.1 | 34.16,5.21 35.05,4.32 35.05,4.06 SW_ENT.1 35.18,4.06 36.83,4.06 37.08,4.32 38.61,4.32 | 34.16,5.21 v34.04,5.08 33.78,5.08 33.66,4.95 29.72,4.95 29.46,4.7 28.07,4.7 26.92,5.84 | 38.61,4.32 38.61,6.1 C33.2 38.73,6.22 41.02,6.22 IC9.C1 41.02,6.35 | 38.61,4.32 38.61,3.81 C25.2 | 41.02,6.35 41.02,6.6 IC9.B1 | 41.02,6.35 41.4,6.35 IC9.C2 41.53,6.35 41.78,6.35 IC9.C3 41.91,6.35 43.69,6.35 43.81,6.22 C24.1 43.94,6.22 44.45,6.73 44.96,6.73 C23.1 | 26.8,6.35 26.29,6.35 26.16,6.22 26.16,6.1 C30.1 | 26.8,6.35 26.92,6.22 26.92,5.84 | 26.92,5.84 25.15,4.06 24.77,4.06 | 24.77,4.06 24.64,4.06 SW_DN.1 24.77,4.06 | 27.69,12.19 27.56,12.06 27.56,7.11 26.8,6.35 | 27.69,12.19 28.83,13.34 28.83,14.61 28.57,14.86 27.81,14.86 27.43,14.48 27.18,14.48 C21.1 | 24.77,4.06 23.24,5.59 22.1,5.59 17.53,1.02 16.26,1.02 16.13,1.14 16.13,1.78 13.97,3.94 13.46,3.94 SW_UP.1 | 25.78,21.08 25.91,21.21 25.91,21.97 U1.P$B7 | 29.34,20.95 29.46,20.83 30.23,20.83 U1.P$F23 30.23,20.7 30.61,20.7 30.73,20.57 31.11,20.57 31.37,20.32 31.5,20.32 33.02,18.8 C11.2 33.02,18.67 33.02,18.03 | 25.78,18.54 25.78,17.53 U1.P$87 | 25.78,18.54 U1.P$83 | 25.78,18.54 U1.P$74 | 26.92,18.54 26.92,17.53 U1.P$88 | 26.92,18.54 U1.P$84 | 26.92,18.54 U1.P$74 | U1.P$80 26.92,19.94 U1.P$74 | U1.P$89 28.19,17.53 28.19,18.54 U1.P$74 | U1.P$85 28.07,18.67 U1.P$74 | 29.34,18.54 29.34,17.53 U1.P$90 | 29.34,18.54 U1.P$86 | 29.34,18.54 U1.P$74 | U1.P$81 28.19,19.94 U1.P$74 | 28.7,20.45 29.21,19.94 U1.P$82 | 25.78,21.08 U1.P$75 | 25.78,21.08 U1.P$74 | U1.P$76 26.8,20.95 26.42,20.57 26.29,20.57 U1.P$74
  Top 0.127: 28.7,20.45 28.19,20.95 U1.P$77 | 28.7,20.45 U1.P$74 | 29.34,20.95 U1.P$78 | 29.34,20.95 U1.P$74 | 21.34,19.56 20.83,19.05 20.83,17.78 19.81,16.76 C6.2 | 21.34,19.56 21.46,19.68 21.72,19.68 C32.1 | v17.78,16 17.78,9.65 18.16,9.27 IC2.B1 | v19.68,9.27 19.3,9.27 IC2.B3 | v20.57,14.1 21.72,15.24 C20.2 | v21.21,19.68 21.34,19.56 | U1.P$74 26.42,20.32 26.16,20.32 25.78,19.94 U1.P$79 | J2.3 38.73,28.32 39.88,28.32 J2.5 40.01,28.19 40.01,27.81 41.02,26.8 41.02,22.61 TP_GND.TP 41.02,22.48 39.88,21.34 39.88,19.68 | 39.88,19.68 39.88,19.18 C22.2 | X1.2 37.08,21.72 37.21,21.84 38.35,21.84 C2.2 38.48,21.97 38.61,21.97 38.86,22.23 38.86,22.73 36.7,24.89 33.91,24.89 | C10.2 33.53,21.46 34.16,21.46 35.43,22.73 X1.4 35.56,22.86 36.7,21.72 36.96,21.72 X1.2 | IC3.8 37.34,13.34 36.96,13.34 IC3.9 36.83,13.34 36.83,13.72 | 36.83,13.72 36.83,15.11 C19.2 36.96,15.24 37.59,15.24 39.62,17.27 | 39.62,17.27 39.62,17.53 C4.2 | 36.07,18.03 36.07,18.67 C1.2 36.07,18.8 36.96,19.68 36.96,21.59 X1.2 | 36.07,18.03 36.07,17.4 C3.2 | 34.42,13.72 34.42,14.48 33.27,15.62 C8.2 33.15,15.75 33.15,17.02 C9.2 33.02,17.14 33.02,18.03 | 34.42,13.72 34.42,13.34 | 34.42,13.34 33.15,12.06 32.13,12.06 30.61,13.59 C7.2 | 34.42,13.34 R3.1 | 33.02,18.03 36.07,18.03 | 34.42,13.72 36.83,13.72 | 39.88,19.68 42.42,19.68 42.67,19.43 42.67,17.53 42.42,17.27 39.62,17.27 | 31.24,30.1 30.61,30.1 30.23,30.48 29.97,30.48 U3.6 29.84,30.61 28.83,30.61 | 28.83,30.61 28.96,30.73 U3.9 | 28.83,30.61 28.32,30.1 28.07,30.1 U3.4 | 28.32,31.5 28.07,31.5 U3.1 28.32,31.5 | 28.32,31.5 28.96,30.86 U3.9 | 28.83,30.61 U3.9 | 28.32,31.5 29.34,32.51 29.34,33.27 TP_BAT_GND.TP
  Top 0.127: C16.2 29.34,26.16 29.34,24.51 29.97,23.88 C15.2 30.1,23.88 30.86,23.88 32.26,25.27 C13.2 32.38,25.4 32.89,25.91 33.78,25.91 33.91,25.78 33.91,24.89 | 33.91,24.89 32.77,23.75 C12.2 | 11.94,31.24 12.95,32.26 13.21,32.26 D3.2 | 11.94,31.24 11.43,30.73 11.18,30.73 10.41,29.97 10.41,29.72 C17.1 10.29,29.59 10.29,28.96 9.02,27.69 8.76,27.69 8.51,27.43 8.51,23.88 | 25.65,28.07 25.02,28.07 | 25.02,28.07 24.26,28.07 R2_USB.2 24.26,27.94 23.62,27.3 22.35,27.3 C43.2 22.23,27.18 21.08,27.18 C42.2 20.95,27.05 20.19,27.05 18.67,28.57 18.67,28.96 J4.A12_B1 18.54,29.08 18.03,29.08 17.53,29.59 J4.SH4 17.4,29.72 17.27,29.84 13.34,29.84 11.94,31.24 | 25.02,28.07 25.02,28.96 J4.A1_B12 25.02,29.08 25.53,29.59 26.04,29.59 J4.SH3 | 25.65,28.07 26.92,26.8 28.83,26.8 29.21,26.42 29.21,26.29 C16.2 | 25.65,28.07 R1_USB.1 | 31.24,30.1 31.24,30.23 31.37,30.35 31.88,30.35 32,30.23 32,29.59 30.35,27.94 30.35,27.3 29.34,26.29 C16.2 | 31.24,30.1 C27.1 | EPD_C11.1 12.83,11.68 12.83,10.79 EPD_C10.1 12.95,10.67 13.46,10.16 14.22,10.16 14.48,9.91 14.48,9.14 13.84,8.51 | 17.65,5.71 15.75,7.62 C38.1 15.75,7.75 14.61,7.75 13.84,8.51 | 13.84,8.51 12.83,9.53 EPD_C12.1 12.7,9.65 11.81,9.65 10.16,11.3 10.16,14.73 10.41,14.99 10.67,14.99 J1.17 10.79,15.11 11.3,15.11 12.32,16.13 12.7,16.13 EPD_C6.1 12.83,16.26 12.83,16.76 | 17.65,5.71 18.03,6.1 20.57,6.1 22.35,7.87 C39.2 22.48,8 22.48,9.4 25.4,12.32 27.43,12.32 27.56,12.19 27.69,12.19 | 17.65,5.71 R2_EP_DR.1 17.53,5.59 16.51,4.57 16.51,3.3 16.26,3.05 15.62,3.05 15.11,3.56 15.11,3.81 14.35,4.57 14.35,5.21 | 14.35,5.21 14.61,5.21 14.73,5.33 R_TYPE_SEL.1
  Top 0.127: 14.35,5.21 12.7,5.21 12.57,5.33 12.57,5.46 C31.1 12.57,5.59 10.03,5.59 9.02,6.6 SJ1.1 9.02,6.73 8.26,7.49 | 8.26,7.49 8.13,7.62 8.13,10.67 J1.MP2 | 8.26,7.49 4.7,3.94 2.54,3.94 D4.1 | 19.18,23.88 20.07,22.99 C14.2 | 19.18,23.88 18.8,24.26 18.8,24.51 C34.1 18.67,24.64 16.64,26.67 | 19.18,23.88 20.45,25.15 21.21,25.15 21.34,25.02 21.34,24.77 C5.2 | 16.64,26.67 16.13,27.18 16.13,28.7 C18.2 | 14.48,13.21 14.22,13.46 13.34,13.46 | 14.48,13.21 15.75,11.94 15.75,10.03 C37.1 | 13.34,13.46 12.83,13.97 EPD_C8.1 12.83,14.1 12.83,14.99 EPD_C7.1 | 13.34,13.46 12.83,12.95 EPD_C9.1 | 12.83,16.76 12.83,17.27 EPD_C5.1 | 15.11,20.19 15.88,19.43 18.03,19.43 18.54,19.94 18.54,20.07 IC1.D2 | 15.11,20.19 13.84,20.19 R9.1 13.72,20.19 13.46,20.19 12.83,19.56 | 14.73,22.35 14.99,22.35 15.11,22.23 15.11,20.19 | 14.73,22.35 13.97,22.35 13.59,21.97 EPD_C1.1 | 14.35,24.38 14.61,24.38 14.73,24.26 14.73,22.35 | 14.35,24.38 13.72,24.38 13.21,23.88 EPD_C2.1 13.08,23.88 8.51,23.88 | 12.83,19.56 10.79,19.56 J1.8 | 8.51,23.88 8.13,23.88 J1.MP1 8.51,23.88 | 12.83,16.76 14.35,16.76 14.48,16.89 | 14.48,16.89 14.48,17.91 12.83,19.56 | 14.48,13.21 15.11,13.84 15.11,15.62 14.48,16.26 14.48,16.89 | 14.35,24.38 16.64,26.67
  Bottom 0.127: v32.77,3.05 32,3.81 31.37,3.81 30.99,4.19 30.99,4.45 31.62,5.08 v34.04,5.08 | 21.21,19.81 25.65,19.81 U1.P$79 | 21.21,19.81 19.94,19.81 17.78,17.65 v17.78,16 19.68,14.1 | 19.68,14.1 v19.68,9.27 | 19.68,14.1 v20.57,14.1 | 21.21,19.81 v21.21,19.68 | J4.SH2 17.53,33.66 17.53,29.72 J4.SH4 | J4.SH1 26.16,33.66 26.16,29.72 J4.SH3
  pour Top: 5.56,12.46 5.04,11.94 5.02,11.92 -1.42,11.92 -1.42,-0.97 -0.97,-1.42 47.97,-1.42 48.92,-0.47 48.92,38.42 1.53,38.42 -1.92,34.97 -1.92,25.53 0.03,23.58 5.52,23.58 5.54,23.56 5.56,23.54 5.58,23.52 5.58,12.48
  pour Bottom: 5.06,12.96 5.04,12.94 5.02,12.92 -1.97,12.92 -2.92,11.97 -2.92,-1.47 -1.97,-2.42 49.47,-2.42 50.42,-1.47 50.42,38.92 1.03,38.92 -2.92,34.97 -2.92,25.03 -0.97,23.08 5.02,23.08 5.04,23.06 5.06,23.04 5.08,23.02 5.08,12.98
HAPTIC_EN
  Top 0.127: U1.P$U1 24.26,18.03 24,18.03 21.84,20.19 21.08,20.19 20.57,19.68 20.57,18.54 19.18,17.14 19.18,15.24 18.29,14.35 18.29,9.78 IC2.A1
LX1  (1 unrouted)
LX2
  Top 0.127: IC9.D2 41.4,5.97 41.78,5.97 IC9.D3 41.91,5.84 42.04,5.84 42.16,5.71 42.16,2.54 41.53,1.91 L7.2
N$1
  Top 0.127: U1.P$C1 24.26,21.59 23.11,21.59 21.72,22.99 21.72,23.75 20.83,24.64 C5.1
N$2
  Top 0.127: IC9.D1 41.02,5.84 40.64,5.84 39.75,4.95 R4.2
N$4
  Top 0.127: IC3.1 36.32,11.81 35.43,11.81 34.54,12.7 R3.2
N$5
  Top 0.127: IC9.E1 41.02,5.46 41.02,3.68 41.15,3.56 R2.2
N$7  (via drill 0.3)
  Top 0.127: v17.02,19.94 17.27,19.68 17.78,19.68 18.16,20.07 IC1.D1 | v16.51,18.92 16,18.92 15.11,19.81 13.84,19.81 R9.2
  Bottom 0.127: v17.02,19.94 17.02,19.43 v16.51,18.92
N$31
  Top 0.127: 25.53,16.51 U1.P$AC5 25.02,16.51 24.89,16.38 21.72,16.38 20.7,15.37 C20.1
N$32
  Top 0.127: U1.P$B3 25.02,22.1 25.02,24.26 25.27,24.51 L2.1
N$33
  Top 0.127: L2.2 24.38,24.64 25.02,25.27 27.3,25.27 27.69,24.89 L3.1
N$45  (via drill 0.3)
  Top 0.127: v31.37,20.95 30.73,20.95 U1.P$E24 | v32.64,20.95 33.27,20.32 C10.1 | 28.7,24.26 28.7,24.13 28.96,23.88 C15.1 28.96,23.75 28.7,23.5 v28.7,23.11 | 28.7,24.26 28.7,26.16 C16.1 | U1.P$B5 25.53,22.1 25.53,23.62 26.67,24.77 L3.2 27.3,24.26 28.7,24.26
  Bottom 0.127: v32.64,20.95 v31.37,20.95 30.86,20.95 v28.7,23.11
N$46
  Top 0.127: U1.P$A18 28.83,22.48 28.83,22.61 29.59,23.37 30.99,23.37 32.38,24.77 32.77,24.77 33.27,25.27 C13.1
N$47
  Top 0.127: U1.P$D2 24.77,21.34 24.77,21.72 24.64,21.84 24.64,22.23 18.67,28.19 17.27,28.19 16.51,28.96 16.51,29.08 16,29.59 11.05,29.59 C17.2 10.92,29.59 10.92,29.21 9.4,27.69 9.4,26.54 X2.1
N$48  (via drill 0.3)
  Top 0.127: v20.45,22.23 21.84,20.83 24.77,20.83 U1.P$F2 | C18.1 15.62,28.7 15.62,28.45 15.88,28.19 v15.88,26.8 15.62,26.54 11.81,26.54 X2.2
  Bottom 0.127: v15.88,26.8 v20.45,22.23
N$59
  Top 0.127: U1.P$N24 30.73,18.92 30.86,18.92 32.38,17.4 32.38,17.14 C9.1
N$60
  Top 0.127: U1.P$D23 30.23,21.34 31.11,21.34 31.24,21.46 31.5,21.46 31.88,21.08 31.88,20.45 33.02,19.3 33.15,19.3 33.66,18.8 C11.1
N$61
  Top 0.127: U1.P$A23 30.23,22.61 34.16,22.61 35.05,23.5 36.32,23.5 36.96,22.86 X1.3 37.08,22.73 37.34,22.48 38.35,22.48 C2.1
N$62
  Top 0.127: 34.54,19.56 33.15,19.56 32.13,20.57 32.13,21.21 31.37,21.97 30.73,21.97 U1.P$B24 | 34.54,19.56 35.31,18.8 C1.1 | 34.54,19.56 35.43,20.45 35.43,21.59 X1.1
N$63  (via drill 0.3)
  Top 0.127: v12.95,6.1 12.95,5.59 C31.2 | v11.56,7.49 11.56,8.13 11.05,8.64 10.41,8.64 R8.1 | v27.94,3.17 30.99,3.17 31.75,3.94 32.26,3.94 SW_ENT.2
  Bottom 0.127: v12.95,6.1 v11.56,7.49 6.86,7.49 6.22,6.86 6.22,6.6 8.51,4.32 13.59,4.32 15.75,2.16 19.05,2.16 20.32,3.43 25.65,3.43 25.91,3.17 v27.94,3.17
N$64
  Top 0.127: L1.2 38.35,16.89 38.99,17.53 C4.1 38.99,17.65 38.86,17.78 38.86,18.41 | 38.86,18.41 38.86,19.05 C22.1 | 38.86,18.41 41.78,18.41 ANT1.1
N$65  (via drill 0.3)
  Top 0.127: v31.37,19.81 30.86,20.32 30.23,20.32 U1.P$H23 | v33.91,16.38 35.69,16.38 35.94,16.64 C3.1 36.07,16.76 36.2,16.89 37.21,16.89 L1.1
  Bottom 0.127: v31.37,19.81 31.37,16.89 31.88,16.38 v33.91,16.38
N$67
  Top 0.127: C30.2 26.54,5.97 26.54,5.84 26.42,5.71 23.5,5.71 23.37,5.84 21.08,5.84 19.3,4.06 R5.1 19.18,4.06 17.91,2.79 15.49,2.79 14.86,3.43 14.86,3.68 13.59,4.95 11.18,4.95 10.67,4.45 10.67,4.06 SW_UP.2
N$68
  Top 0.127: R2_USB.1 23.62,28.07 20.45,28.07 20.07,28.45 20.07,28.96 J4.B5
N$69
  Top 0.127: R1_USB.2 26.29,28.19 26.92,28.83 26.92,30.48 26.42,30.99 24.13,30.99 23.11,29.97 23.11,29.08 J4.A5
N$70
  Top 0.127: EPD_C2.2 14.1,23.75 11.94,21.59 10.79,21.59 J1.4
N$71
  Top 0.127: C32.2 21.72,19.3 21.72,17.4 18.8,14.48 18.8,9.78 IC2.A2
N$72  (via drill 0.3)
  Top 0.127: C2-EP-DR.2 28.19,11.68 28.19,8.13 28.45,7.87 L5.1 28.57,7.75 28.57,5.97 v29.34,5.21 | v18.41,2.67 17.53,1.78 16.64,1.78 Q3.3 | v6.73,6.73 5.46,8 D5.2
  Bottom 0.127: v6.73,6.73 8.89,4.57 13.72,4.57 15.62,2.67 v18.41,2.67 19.18,2.67 20.19,3.68 25.78,3.68 26.04,3.43 27.56,3.43 v29.34,5.21
N$73
  Top 0.127: EPD_C1.2 14.48,21.84 13.72,21.08 10.79,21.08 J1.5
N$74  (via drill 0.3)
  Top 0.127: v14.48,14.61 14.35,14.61 13.97,14.99 EPD_C7.2 | v11.81,14.61 11.3,14.1 10.79,14.1 J1.19
  Bottom 0.127: v11.81,14.61 v14.48,14.61
N$75
  Top 0.127: 15.49,5.33 15.88,5.71 R1_EP_DR.1 | 15.49,5.33 15.11,4.95 14.86,4.95 R_TYPE_SEL.2 | 15.49,5.33 14.73,6.1 13.59,6.1 13.08,6.6 10.67,6.6 SJ1.2
N$76
  Top 0.127: EPD_C12.2 13.84,9.65 13.59,9.65 13.08,10.16 12.06,10.16 10.79,11.43 J1.24
N$77  (via drill 0.3)
  Top 0.127: v14.61,13.97 13.97,13.97 EPD_C8.2 | v11.81,13.97 11.56,13.97 11.18,13.59 10.79,13.59 J1.20
  Bottom 0.127: v11.81,13.97 v14.61,13.97
N$79
  Top 0.127: EPD_C6.2 13.84,16.13 13.34,15.62 12.19,15.62 11.18,14.61 10.79,14.61 J1.18
N$80
  Top 0.127: EPD_C10.2 13.84,10.79 13.34,11.3 13.34,12.19 13.21,12.32 12.06,12.32 11.94,12.45 10.79,12.45 J1.22
N$81  (via drill 0.3)
  Top 0.127: C2-EP-DR.1 27.05,11.68 26.04,11.68 24.38,10.03 D2.1 24.26,9.91 24.26,8.76 22.86,7.37 22.23,7.37 19.94,5.08 v19.68,5.08 | v10.41,5.08 9.27,3.94 6.1,3.94 D4.2
  Bottom 0.127: v19.68,5.08 v10.41,5.08
OUT+  (via drill 0.3)
  Top 0.127: v15.49,16.26 16.51,15.24 16.51,8.89 17.53,7.87 18.92,7.87 20.19,9.14 20.19,9.4 19.81,9.78 19.3,9.78 IC2.A3 | v15.49,23.62 16.51,24.64 TP_OP.TP
  Bottom 0.127: v15.49,23.62 v15.49,16.26
OUT-
  Top 0.127: IC2.C3 19.18,8.64 18.67,8.13 17.65,8.13 16.76,9.02 16.76,16.89 16.64,17.02 TP_ON.TP
P1.01/1.6C
  Top 0.127: R_PWR_EPD.1 2.67,29.72 5.71,29.72 6.73,28.7 Q1.1
P1.02/1.6C  (via drill 0.3)
  Top 0.127: v34.04,2.54 34.04,2.92 C29.2 | v31.5,4.32 30.86,4.32 R7.1 | v22.48,5.08 21.84,4.45 21.84,4.06 SW_DN.2
  Bottom 0.127: 33.15,3.43 32.26,4.32 v31.5,4.32 | 33.15,3.43 v34.04,2.54 | v22.48,5.08 28.57,5.08 29.21,5.71 34.04,5.71 34.54,5.21 34.54,4.83 33.15,3.43
PREVGH  (via drill 0.3)
  Top 0.127: v14.48,12.32 13.97,12.83 EPD_C9.2 | v11.56,12.95 10.79,12.95 J1.21 | v4.45,8.13 1.91,8.13 D5.1
  Bottom 0.127: v14.48,12.32 12.19,12.32 v11.56,12.95 6.73,8.13 v4.45,8.13
PREVGL  (via drill 0.3)
  Top 0.127: 14.35,11.3 15.37,10.29 15.37,9.65 17.4,7.62 19.05,7.62 24.26,12.83 24.26,13.34 D2.2 | 14.35,11.3 13.97,11.68 EPD_C11.2 | v11.81,11.94 10.79,11.94 J1.23 | 14.35,11.3 v14.48,11.3
  Bottom 0.127: v11.81,11.94 13.84,11.94 v14.48,11.3
RESE
  Top 0.127: Q3.2 15.88,3.94 15.88,5.08 R1_EP_DR.2 16,5.08 16.38,5.46 16.38,5.84 15.88,6.35 14.73,6.35 9.91,11.18 9.91,21.59 10.29,21.97 10.67,21.97 J1.3
RESET
  Top 0.127: J2.6 40.01,29.46 40.51,29.46 41.15,28.83 41.53,28.83 43.81,26.54 43.81,22.35 TP_RESET.TP
SCL/1.4C  (via drill 0.3)
  Top 0.127: v17.65,9.14 17.78,9.14 18.16,8.76 IC2.C1 | v30.73,30.61 30.35,30.99 29.97,30.99 U3.7
  Bottom 0.127: v17.65,9.14 17.65,15.49 17.27,15.88 17.27,18.29 19.18,20.19 19.18,20.32 29.46,30.61 v30.73,30.61
SCL/2.4C  (via drill 0.3)
  Top 0.127: TP_SCL.TP 44.2,9.53 44.07,9.4 41.4,9.4 41.15,9.65 40.77,9.65 R17.2 40.64,9.65 v39.62,8.64 | v17.27,20.83 18.03,20.83 IC1.B1 | v39.12,5.46 39.12,4.95 R4.1 | v36.96,12.32 36.45,12.32 IC3.12
  Bottom 0.127: v17.27,20.83 16,19.56 16,9.4 18.41,6.99 37.59,6.99 v39.12,5.46 40.01,4.57 40.64,4.57 41.02,4.95 41.02,5.21 38.61,7.62 | v36.96,12.32 36.96,9.27 38.61,7.62 | 38.61,7.62 v39.62,8.64
SDA/1.4C  (1 unrouted)
SDA/2.4C  (via drill 0.3)
  Top 0.127: R18.2 41.66,9.78 41.78,9.78 44.07,12.06 TP_SDA.TP 44.2,12.06 45.59,10.67 45.59,4.19 45.34,3.94 45.34,2.67 44.2,1.52 43.94,1.52 42.93,0.51 40.77,0.51 40.64,0.64 40.64,3.43 R2.1 40.64,3.56 40.64,4.95 v40.51,5.08 | v17.65,20.19 17.78,20.19 18.03,20.45 IC1.C1 | v36.45,11.05 36.83,11.43 36.83,11.68 IC3.2
  Bottom 0.127: v17.65,20.19 17.65,19.43 16.76,18.54 16.76,9.02 18.41,7.37 32.77,7.37 35.43,10.03 | v36.45,11.05 35.43,10.03 | v40.51,5.08 35.56,10.03 35.43,10.03
SWDCLK  (via drill 0.3)
  Top 0.127: v31.88,17.02 30.73,17.02 U1.P$AA24 | v33.91,17.02 34.42,17.02 v34.92,17.53 | v38.23,28.96 38.73,29.46 J2.4 | v34.54,30.35 32,32.89 TP_SWDCLK.TP
  Bottom 0.127: v33.91,17.02 v31.88,17.02 | v34.92,17.53 34.92,22.99 37.72,25.78 37.72,28.45 37.85,28.57 | v38.23,28.96 37.85,28.57 | v34.54,30.35 35.05,30.35 35.56,29.84 36.58,29.84 37.85,28.57
SWDIO
  Top 0.127: J2.2 37.34,29.59 36.7,29.59 36.45,29.84 34.04,29.84 31.88,27.69 TP_SWDIO.TP
SWO
  Top 0.127: U1.P$AD22 29.84,16 29.84,15.88 32.38,13.34 32.64,13.34 TP_SWO.TP
VBAT/1.2A
  Top 0.127: U3.2 28.07,30.99 28.07,30.61 U3.3 27.94,30.48 27.56,30.48 27.3,30.23 27.3,29.84 29.08,28.07 TP_VBAT.TP 29.21,28.07 29.84,28.07 31.62,29.84 31.62,29.97 C27.2
VBAT/2.5C  (via drill 0.3)
  Top 0.127: v18.67,15.75 18.03,16.38 18.03,18.92 18.92,19.81 18.92,20.07 18.54,20.45 IC1.C2 | v22.86,25.53 v27.69,25.53 | v14.99,16.64 14.99,16.13 16.13,14.99 16.13,10.03 C37.2
  Bottom 0.127: v18.67,15.75 22.99,15.75 23.37,15.37 23.62,15.37 24,15.75 24,16.51 23.75,16.76 23.75,17.02 24.13,17.4 24.89,17.4 25.53,16.76 28.32,16.76 28.7,17.14 28.7,22.48 27.69,23.5 v27.69,25.53 | v22.86,25.53 19.05,25.53 15.24,29.34 9.4,29.34 9.02,28.96 9.02,22.61 v14.99,16.64
VBUS/1.5D  (via drill 0.3)
  Top 0.127: C42.1 21.08,26.67 v21.46,26.67 21.84,26.67 22.23,26.29 C43.1 | v20.57,27.56 19.94,28.19 19.81,28.19 19.43,28.57 19.43,28.96 J4.A9_B4 | v23.88,30.1 24.13,29.84 24.13,29.08 J4.A4_B9 | v9.65,32.26 10.67,32.26 D3.5
  Bottom 0.127: 20.95,27.18 v20.57,27.56 17.91,27.56 13.21,32.26 v9.65,32.26 | 20.95,27.18 v21.46,26.67 | 20.95,27.18 v23.88,30.1
VBUS/2.6D  (via drill 0.3)
  Top 0.127: 24.77,15.88 24.77,15.75 26.29,14.22 | 24.77,15.88 24.77,16 U1.P$AD2 | 26.29,14.22 26.67,13.84 27.69,13.84 28.07,14.22 C21.2 | v20.07,19.3 20.19,19.43 20.19,20.32 19.18,21.34 18.54,21.34 IC1.A2 | 24.77,15.88 v23.5,15.88 | 26.29,14.22 26.29,14.1 19.56,7.37 17.27,7.37 17.02,7.62 16.13,7.62 C38.2
  Bottom 0.127: v23.5,15.88 v20.07,19.3
VREG  (via drill 0.3)
  Top 0.127: IC9.A1 41.4,7.11 IC9.A2 41.53,7.11 41.78,7.11 IC9.A3 41.91,7.11 43.69,7.11 43.81,7.24 C24.2 43.94,7.24 44.96,7.24 | 44.96,7.24 45.09,7.24 45.34,6.99 45.34,4.32 43.81,2.79 TP_VREG.TP | 44.96,7.24 C23.2 | v19.05,20.83 18.54,20.83 IC1.B2 | v20.7,7.87 21.34,7.87 C39.1 | IC9.A1 38.73,7.11 38.23,6.6 38.23,5.84 38.1,5.71 37.21,5.71 33.91,9.02 v33.91,9.14 | IC9.A1
  Bottom 0.127: v19.05,20.83 19.05,20.57 17.91,19.43 17.91,19.3 17.02,18.41 17.02,9.14 18.29,7.87 v20.7,7.87 21.97,9.14 v33.91,9.14